# Altium PCB Copy of main - shifted.PcbDoc (part 7 of 15)
Units mil, origin at the board's own origin, x right, y up, seen from the top; angles counter-clockwise.
Board outline 8394.55 x 5164.44 mil, 7 copper layers (Top Layer 1, Layer 2, Layer 3, Unused, Layer 4_pow, Layer 5_gnd, Bottom 6+gnd), stack 46.112 mil thick; 363 components, 409 nets, 1750 pads, 991 vias.
Unrouted connection lines stored in the file: 111.
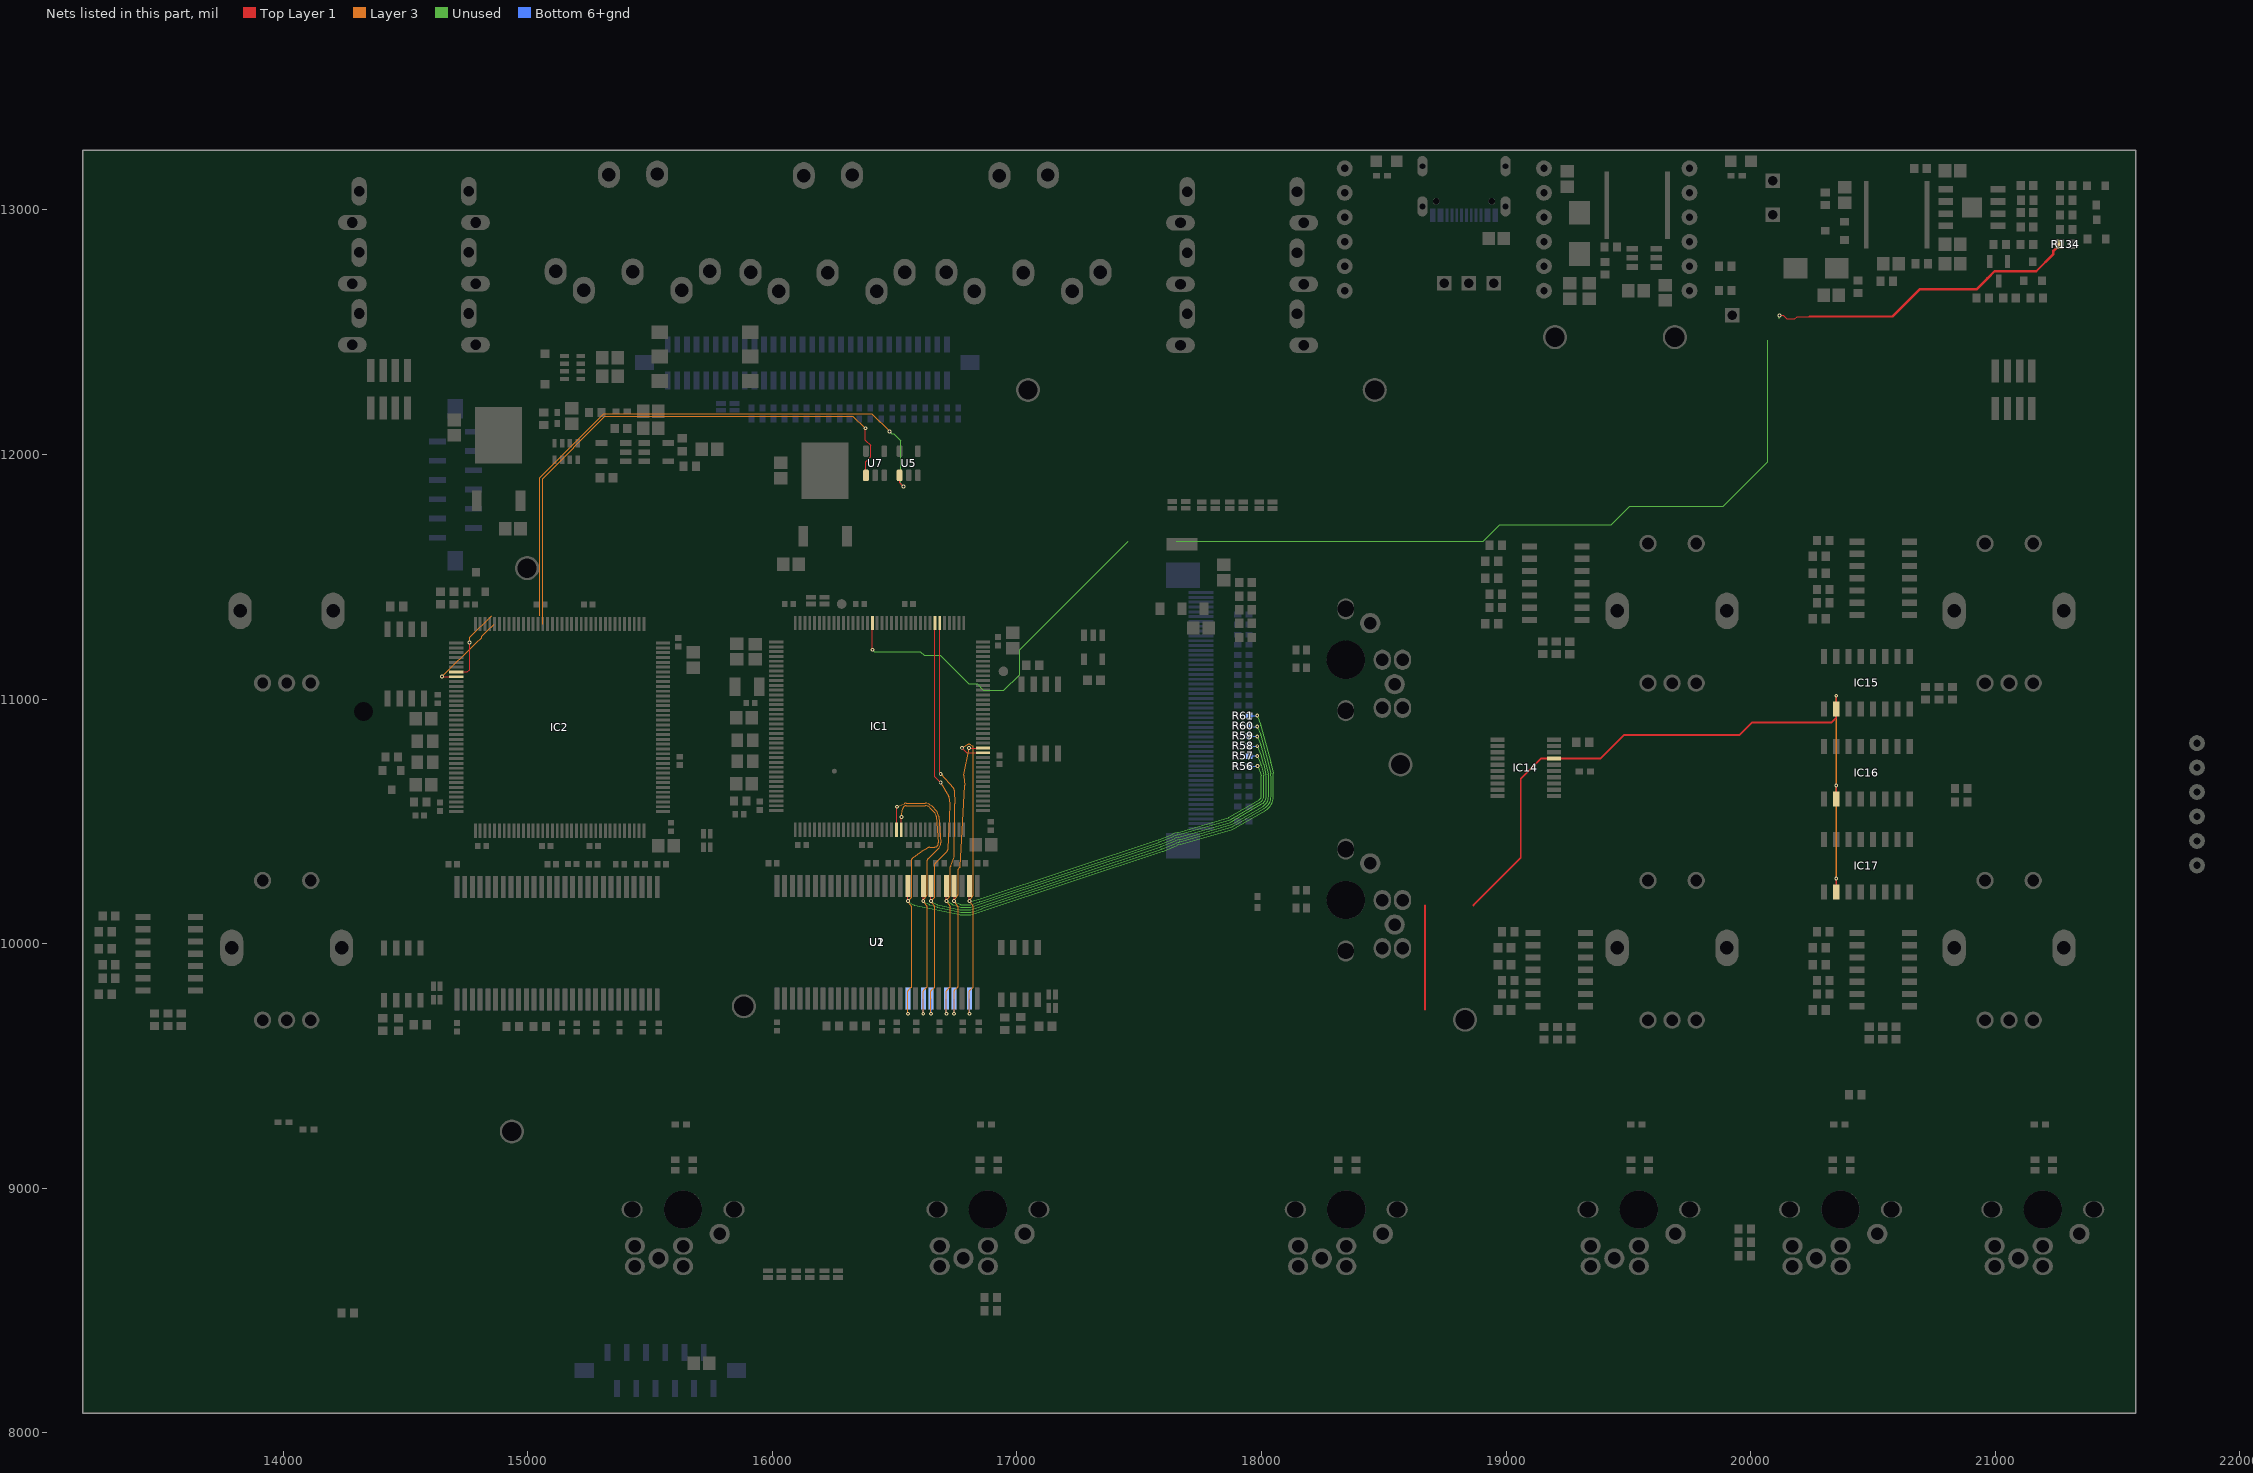
[diagram p10: the nets of this part, all layers, seen from the top]

## Via types
v1: diameter 15.75, hole 7.87, Top Layer 1 to Bottom 6+gnd, tented both sides, 923 vias
v2: diameter 27.56, hole 11.81, Top Layer 1 to Bottom 6+gnd, 45 vias
v3: diameter 23.62/23.62/23.62/23.62/23.62/23.62/23.62 (per signal layer), hole 12, Top Layer 1 to Bottom 6+gnd, tented top, 10 vias
v4: diameter 15.75, hole 7.87, Top Layer 1 to Bottom 6+gnd, 10 vias
v5: diameter 23.62/23.62/23.62/23.62/23.62/23.62/23.62 (per signal layer), hole 12, Top Layer 1 to Bottom 6+gnd, tented bottom, 3 vias

## Nets (pads, with @x,y where several pads share a name; then routed paths per layer and width w, separated by ;. In a path a pad name is that pad's centre, name@x,y a point inside that pad or via, vN(x,y) a via of type N, cw(c..) or ccw(c..) an arc to the next point about the centre after c; other vN are vias at no path point) (continued)
CHR2: IC1.128 R134.1 | length 5889.3
  Top Layer 1 w5: IC1.128@16408.62,11311.57 16408.62,11201.77 v1(16408.67,11201.72) ; v1(20117.63,12569) 20134.22,12569 20148.6,12554.63 20181.14,12554.63 20190.91,12564.4 20242.23,12564.4
  Top Layer 1 w10: 20242.23,12564.3 20580.72,12564.3 20692.99,12676.57 20925.51,12676.57 20968.07,12719.14 20968.07,12720.23 20997.22,12749.37 21033.22,12749.37 21167.91,12749.37 21237.99,12819.45 21237.99,12832.55 21263.46,12858.03 R134.1@21263.46,12860
  Unused w5: v1(16408.67,11201.72) 16409.17,11201.72 16416.62,11194.27 16604.71,11194.27 16620.17,11178.82 16685.32,11178.82 16802.4,11061.74 16836.8,11061.74 16862.71,11035.83 16946.73,11035.83 17011.15,11100.25 17011.15,11201.83 17454.71,11645.39 ; 17651.56,11645.39 18906.57,11645.39 18975,11713.82 19430,11713.82 19504.63,11788.44 19888.44,11788.44 20070,11970 20070,12468.31 ; 20117.63,12555.31 v1(20117.63,12569)
CLK: IC14.17 IC15.2 IC16.2 IC17.2 | length 3363.2
  Top Layer 1 w8: 18669.14,9731.43 18669.14,10156.43 ; 18865.99,10156.43 19060,10350.43 19060,10673.82 19143.39,10757.2 IC14.17@19195.67,10757.2 19386.77,10757.2 19483.38,10853.82 19955,10853.82 20005.91,10904.73 20330.91,10904.73 20350,10923.82 IC15.2@20350,10959.25 v1(20350,11013.82) ; IC17.2@20350,10211.53 v1(20350,10266.1) ; IC16.2@20350,10591.53 v1(20350,10646.1)
  Layer 3 w8: v1(20350,10266.1) v1(20350,10646.1) v1(20350,11013.82)
CODEC_GPIO1: IC2.7 U5.1 | length 2755.6
  Top Layer 1 w5: IC2.7@14707.15,11111.01 14752.23,11111.01 14761.48,11120.26 14761.48,11230.5 v1(14760.86,11231.13) ; U5.1@16520,11915 16520,11885 v1(16535.91,11869.09)
  Unused w5: v1(16479.29,12094.57) 16488.49,12085.37 16495.51,12085.37 16525,12055.88 16525,11880 v1(16535.91,11869.09)
  Layer 3 w5: v1(14760.86,11231.13) 14762.91,11233.19 14762.91,11252.74 14851.57,11341.4 ; 15048.42,11341.4 15048.42,11904.44 15311.34,12167.36 16406.46,12167.36 v1(16479.29,12094.57)
CODEC_GPIO2: IC2.8 U7.1 | length 2615.9
  Top Layer 1 w5: v1(14648.98,11092.54) 14650.2,11091.32 IC2.8@14707.15,11091.32 ; v1(16380.62,12107.57) 16380.62,12058.44 16401.71,12037.34 16401.71,11990.29 16382.6,11971.18 U7.1@16382.6,11915
  Layer 3 w5: v1(14648.98,11092.54) 14650.69,11092.54 14788.15,11230 14789.51,11230 14811.33,11251.82 14811.33,11256.99 14833.15,11278.81 14835.03,11278.81 14863.15,11306.93 ; 15060,11306.93 15060,11901.88 15315.49,12157.36 16329.2,12157.36 16378.99,12107.57 v1(16380.62,12107.57)
D0: IC1.85 R56.2 U1.2 U2.2 | length 2818.1
  Top Layer 1 w5: v1(16775.56,10800.87) 16775.56,10799.7 16794.71,10780.55 IC1.85@16860.91,10780.55 ; v1(16805.86,10174.13) 16805.86,10193.72 U1.2@16806.1,10236.22
  Unused w5: v1(16805.86,10174.13) 16810.86,10174.13 ccw(c16810.86,10179.13) 16812.11,10174.29 16849.48,10183.96 ccw(c16847.6,10191.22) 16849.95,10184.1 17577.92,10424.93 ccw(c17573.21,10439.17) 17578.83,10425.27 17636.68,10448.1 cw(c17710.04,10262.58) 17654.74,10454.26 17863.18,10514.57 cw(c17866.01,10504.98) 17863.37,10514.62 ccw(c17859.4,10529.09) 17866.96,10516.13 17991.32,10588.71 ccw(c17983.57,10601.98) 17998.94,10601.98 17998.94,10681.98 ccw(c17983.57,10681.98) 17998.02,10687.24 v1(17983.57,10726.98)
  Layer 3 w5: v1(16775.56,10800.87) 16775.56,10801.09 16775.29,10801.37 16796.46,10813.13 cw(c16803.93,10799.69) 16811.85,10812.87 16818.82,10808.67 cw(c16816.25,10804.39) 16821.25,10804.48 16821.25,10200.46 cw(c16816.25,10200.55) 16820.43,10197.8 16806.68,10176.88 ccw(c16810.86,10174.13) 16805.86,10174.19 v1(16805.86,10174.13) ccw(c16810.86,10174.13) 16806.91,10171.06 16820.93,10152.99 cw(c16816.98,10149.93) 16821.98,10150.02 16821.98,9825.33 cw(c16816.98,9825.42) 16820.52,9821.89 16807.3,9808.63 ccw(c16810.86,9805.12) 16805.86,9805.12 v1(16805.86,9713.5)
  Bottom 6+gnd w5: v1@16806.1,9713.75 U2.2@16806.1,9775.59 ; R56.2@17948.43,10726.14 17982.72,10726.14 v1(17983.57,10726.98)
D1: IC1.86 R57.2 U1.4 U2.4 | length 3162.8
  Top Layer 1 w5: v1(16742.87,10174.13) U1.4@16742.87,10235.97 ; v1(16803.93,10799.69) 16804.2,10799.96 16860.63,10799.96 IC1.86@16860.75,10800.08
  Unused w5: v1(16742.87,10174.13) 16744.35,10172.65 ccw(c16747.87,10176.21) 16745.56,10171.77 16767.32,10160.47 ccw(c16774.36,10174.13) 16774.36,10158.76 16805.86,10158.76 ccw(c16805.86,10174.13) 16811.06,10159.67 16846.4,10171.96 cw(c16871.26,10100.81) 16847.55,10172.35 17581.09,10415.45 ccw(c17573.21,10439.17) 17582.5,10415.97 17640.38,10438.81 cw(c17710.04,10262.58) 17657.5,10444.65 17866.01,10504.98 cw(c17868.79,10495.37) 17866.07,10504.99 ccw(c17859.4,10529.09) 17872,10507.5 17996.36,10580.07 ccw(c17983.57,10601.98) 18008.94,10601.98 18008.94,10681.98 ccw(c17983.57,10681.98) 18008.31,10687.62 17998.56,10730.4 ccw(c17983.57,10726.98) 17997.62,10733.21 v1(17982.46,10767.45)
  Layer 3 w5: v1(16742.87,9713.5) 16742.87,9805.11 cw(c16747.87,9805.12) 16744.31,9808.63 16757.53,9821.89 ; 16766.69,10312.37 16758.99,10304.67 16758.99,10201.19 ; v1(16803.93,10799.69) 16781.9,10688.37 ; 16757.53,9821.89 ccw(c16753.99,9825.42) 16758.99,9825.33 ; 16757.53,9821.89 ccw(c16753.99,9825.42) 16758.99,9825.33 ; 16757.53,9821.89 ccw(c16753.99,9825.42) 16758.99,9825.33 ; 16757.53,9821.89 ccw(c16753.99,9825.42) 16758.99,9825.33 ; 16757.53,9821.89 ccw(c16753.99,9825.42) 16758.99,9825.33 ; 16757.53,9821.89 ccw(c16753.99,9825.42) 16758.99,9825.33 ; 16757.53,9821.89 ccw(c16753.99,9825.42) 16758.99,9825.33 ; 16757.53,9821.89 ccw(c16753.99,9825.42) 16758.99,9825.33 ; 16757.53,9821.89 ccw(c16753.99,9825.42) 16758.99,9825.33 ; 16757.53,9821.89 ccw(c16753.99,9825.42) 16758.99,9825.33 ; 16757.53,9821.89 ccw(c16753.99,9825.42) 16758.99,9825.33 ; 16757.53,9821.89 ccw(c16753.99,9825.42) 16758.99,9825.33 ; 16757.53,9821.89 ccw(c16753.99,9825.42) 16758.99,9825.33 ; 16757.53,9821.89 ccw(c16753.99,9825.42) 16758.99,9825.33 ; 16757.53,9821.89 ccw(c16753.99,9825.42) 16758.99,9825.33 ; 16757.53,9821.89 ccw(c16753.99,9825.42) 16758.99,9825.33 ; 16757.94,10152.99 cw(c16753.99,10149.93) 16758.99,10150.02 ; 16757.94,10152.99 cw(c16753.99,10149.93) 16758.99,10150.02 ; 16757.94,10152.99 cw(c16753.99,10149.93) 16758.99,10150.02 ; 16757.94,10152.99 cw(c16753.99,10149.93) 16758.99,10150.02 ; 16757.94,10152.99 cw(c16753.99,10149.93) 16758.99,10150.02 ; 16757.94,10152.99 cw(c16753.99,10149.93) 16758.99,10150.02 ; 16757.94,10152.99 cw(c16753.99,10149.93) 16758.99,10150.02 ; 16757.94,10152.99 cw(c16753.99,10149.93) 16758.99,10150.02 ; 16757.94,10152.99 cw(c16753.99,10149.93) 16758.99,10150.02 ; 16757.94,10152.99 cw(c16753.99,10149.93) 16758.99,10150.02 ; 16757.94,10152.99 cw(c16753.99,10149.93) 16758.99,10150.02 ; 16757.94,10152.99 cw(c16753.99,10149.93) 16758.99,10150.02 ; 16757.94,10152.99 cw(c16753.99,10149.93) 16758.99,10150.02 ; 16757.94,10152.99 cw(c16753.99,10149.93) 16758.99,10150.02 ; 16757.94,10152.99 cw(c16753.99,10149.93) 16758.99,10150.02 ; 16757.94,10152.99 cw(c16753.99,10149.93) 16758.99,10150.02 ; 16757.94,10152.99 16743.92,10171.06 cw(c16747.87,10174.13) v1(16742.87,10174.13) 16742.87,10174.19 cw(c16747.87,10174.13) 16743.7,10176.9 16758.15,10198.5 ; 16758.15,10198.5 ccw(c16753.99,10201.28) 16758.99,10201.19 ; 16758.15,10198.5 ccw(c16753.99,10201.28) 16758.99,10201.19 ; 16758.15,10198.5 ccw(c16753.99,10201.28) 16758.99,10201.19 ; 16758.15,10198.5 ccw(c16753.99,10201.28) 16758.99,10201.19 ; 16758.15,10198.5 ccw(c16753.99,10201.28) 16758.99,10201.19 ; 16758.15,10198.5 ccw(c16753.99,10201.28) 16758.99,10201.19 ; 16758.15,10198.5 ccw(c16753.99,10201.28) 16758.99,10201.19 ; 16758.15,10198.5 ccw(c16753.99,10201.28) 16758.99,10201.19 ; 16758.15,10198.5 ccw(c16753.99,10201.28) 16758.99,10201.19 ; 16758.15,10198.5 ccw(c16753.99,10201.28) 16758.99,10201.19 ; 16758.15,10198.5 ccw(c16753.99,10201.28) 16758.99,10201.19 ; 16758.15,10198.5 ccw(c16753.99,10201.28) 16758.99,10201.19 ; 16758.15,10198.5 ccw(c16753.99,10201.28) 16758.99,10201.19 ; 16758.15,10198.5 ccw(c16753.99,10201.28) 16758.99,10201.19 ; 16758.15,10198.5 ccw(c16753.99,10201.28) 16758.99,10201.19 ; 16758.15,10198.5 ccw(c16753.99,10201.28) 16758.99,10201.19 ; 16758.99,9825.33 16758.99,10150.02 ; 16766.7,10312.39 ccw(c16763.12,10315.88) 16768.11,10315.61 ; 16766.7,10312.39 ccw(c16763.12,10315.88) 16768.11,10315.61 ; 16766.7,10312.39 ccw(c16763.12,10315.88) 16768.11,10315.61 ; 16766.7,10312.39 ccw(c16763.12,10315.88) 16768.11,10315.61 ; 16766.7,10312.39 ccw(c16763.12,10315.88) 16768.11,10315.61 ; 16766.7,10312.39 ccw(c16763.12,10315.88) 16768.11,10315.61 ; 16766.7,10312.39 ccw(c16763.12,10315.88) 16768.11,10315.61 ; 16766.7,10312.39 ccw(c16763.12,10315.88) 16768.11,10315.61 ; 16766.7,10312.39 ccw(c16763.12,10315.88) 16768.11,10315.61 ; 16766.7,10312.39 ccw(c16763.12,10315.88) 16768.11,10315.61 ; 16766.7,10312.39 ccw(c16763.12,10315.88) 16768.11,10315.61 ; 16766.7,10312.39 ccw(c16763.12,10315.88) 16768.11,10315.61 ; 16766.7,10312.39 ccw(c16763.12,10315.88) 16768.11,10315.61 ; 16766.7,10312.39 ccw(c16763.12,10315.88) 16768.11,10315.61 ; 16766.7,10312.39 ccw(c16763.12,10315.88) 16768.11,10315.61 ; 16766.7,10312.39 ccw(c16763.12,10315.88) 16768.11,10315.61 ; 16768.11,10315.61 16785.59,10645.65 ; 16781.71,10683.74 cw(c16796.99,10685.43) 16781.9,10688.37 ; 16781.71,10683.74 cw(c16796.99,10685.43) 16781.9,10688.37 ; 16781.71,10683.74 cw(c16796.99,10685.43) 16781.9,10688.37 ; 16781.71,10683.74 cw(c16796.99,10685.43) 16781.9,10688.37 ; 16781.71,10683.74 cw(c16796.99,10685.43) 16781.9,10688.37 ; 16781.71,10683.74 cw(c16796.99,10685.43) 16781.9,10688.37 ; 16781.71,10683.74 cw(c16796.99,10685.43) 16781.9,10688.37 ; 16781.71,10683.74 cw(c16796.99,10685.43) 16781.9,10688.37 ; 16781.71,10683.74 cw(c16796.99,10685.43) 16781.9,10688.37 ; 16781.71,10683.74 cw(c16796.99,10685.43) 16781.9,10688.37 ; 16781.71,10683.74 cw(c16796.99,10685.43) 16781.9,10688.37 ; 16781.71,10683.74 cw(c16796.99,10685.43) 16781.9,10688.37 ; 16781.71,10683.74 cw(c16796.99,10685.43) 16781.9,10688.37 ; 16781.71,10683.74 cw(c16796.99,10685.43) 16781.9,10688.37 ; 16781.71,10683.74 cw(c16796.99,10685.43) 16781.9,10688.37 ; 16781.71,10683.74 cw(c16796.99,10685.43) 16781.9,10688.37 ; 16781.71,10683.74 16785.53,10648.16 ; 16785.53,10648.16 cw(c16770.24,10646.51) 16785.59,10645.65 ; 16785.53,10648.16 cw(c16770.24,10646.51) 16785.59,10645.65 ; 16785.53,10648.16 cw(c16770.24,10646.51) 16785.59,10645.65 ; 16785.53,10648.16 cw(c16770.24,10646.51) 16785.59,10645.65 ; 16785.53,10648.16 cw(c16770.24,10646.51) 16785.59,10645.65 ; 16785.53,10648.16 cw(c16770.24,10646.51) 16785.59,10645.65 ; 16785.53,10648.16 cw(c16770.24,10646.51) 16785.59,10645.65 ; 16785.53,10648.16 cw(c16770.24,10646.51) 16785.59,10645.65 ; 16785.53,10648.16 cw(c16770.24,10646.51) 16785.59,10645.65 ; 16785.53,10648.16 cw(c16770.24,10646.51) 16785.59,10645.65 ; 16785.53,10648.16 cw(c16770.24,10646.51) 16785.59,10645.65 ; 16785.53,10648.16 cw(c16770.24,10646.51) 16785.59,10645.65 ; 16785.53,10648.16 cw(c16770.24,10646.51) 16785.59,10645.65 ; 16785.53,10648.16 cw(c16770.24,10646.51) 16785.59,10645.65 ; 16785.53,10648.16 cw(c16770.24,10646.51) 16785.59,10645.65 ; 16785.53,10648.16 cw(c16770.24,10646.51) 16785.59,10645.65
  Bottom 6+gnd w5: v1@16743.11,9713.75 U2.4@16743.11,9775.59 ; R57.2@17948.43,10767.45 v1(17982.46,10767.45)
D2: IC1.114 R58.2 U1.5 U2.5 | length 3747.1
  Top Layer 1 w5: IC1.114@16684.21,11311.57 16684.21,10700.66 16688.15,10696.73 v1(16688.15,10693.82) ; v1(16711.37,10174.13) 16711.37,10193.72 U1.5@16711.61,10236.22
  Unused w5: v1@16713.85,10172.67 ccw(c16716.37,10176.99) 16713.94,10172.62 16735.47,10160.65 ccw(c16742.87,10174.13) 16737.92,10159.58 16766.34,10150.06 ccw(c16774.36,10174.13) 16774.36,10148.76 16805.86,10148.76 ccw(c16805.86,10174.13) 16814.32,10150.21 16849.68,10162.52 cw(c16871.26,10100.81) 16850.7,10162.86 17584.2,10405.95 ccw(c17573.21,10439.17) 17586.17,10406.66 17644.1,10429.53 cw(c17710.04,10262.58) 17660.24,10435.03 17868.79,10495.37 ccw(c17859.4,10529.09) 17877.04,10498.86 18001.4,10571.43 ccw(c17983.57,10601.98) 18018.94,10601.98 18018.94,10681.98 ccw(c17983.57,10681.98) 18018.06,10689.85 18008.31,10732.62 ccw(c17983.57,10726.98) 18007.97,10733.92 17997.25,10771.66 ccw(c17982.46,10767.45) 17996.65,10773.36 v1(17982.46,10807.45)
  Layer 3 w5: v1(16688.15,10693.82) 16739.14,10637.17 cw(c16727.71,10626.89) 16743.05,10627.9 16743.06,10627.74 16746.21,10572.32 ; v1(16711.37,9713.5) 16711.37,9805.11 cw(c16716.37,9805.12) 16712.82,9808.63 16726.03,9821.89 ; 16726.03,9821.89 ccw(c16722.49,9825.42) 16727.49,9825.33 ; 16726.03,9821.89 ccw(c16722.49,9825.42) 16727.49,9825.33 ; 16726.03,9821.89 ccw(c16722.49,9825.42) 16727.49,9825.33 ; 16726.03,9821.89 ccw(c16722.49,9825.42) 16727.49,9825.33 ; 16726.03,9821.89 ccw(c16722.49,9825.42) 16727.49,9825.33 ; 16726.03,9821.89 ccw(c16722.49,9825.42) 16727.49,9825.33 ; 16726.03,9821.89 ccw(c16722.49,9825.42) 16727.49,9825.33 ; 16726.03,9821.89 ccw(c16722.49,9825.42) 16727.49,9825.33 ; 16726.03,9821.89 ccw(c16722.49,9825.42) 16727.49,9825.33 ; 16726.03,9821.89 ccw(c16722.49,9825.42) 16727.49,9825.33 ; 16726.03,9821.89 ccw(c16722.49,9825.42) 16727.49,9825.33 ; 16726.03,9821.89 ccw(c16722.49,9825.42) 16727.49,9825.33 ; 16726.03,9821.89 ccw(c16722.49,9825.42) 16727.49,9825.33 ; 16726.03,9821.89 ccw(c16722.49,9825.42) 16727.49,9825.33 ; 16726.03,9821.89 ccw(c16722.49,9825.42) 16727.49,9825.33 ; 16726.03,9821.89 ccw(c16722.49,9825.42) 16727.49,9825.33 ; 16726.44,10152.99 cw(c16722.49,10149.93) 16727.49,10150.02 ; 16726.44,10152.99 cw(c16722.49,10149.93) 16727.49,10150.02 ; 16726.44,10152.99 cw(c16722.49,10149.93) 16727.49,10150.02 ; 16726.44,10152.99 cw(c16722.49,10149.93) 16727.49,10150.02 ; 16726.44,10152.99 cw(c16722.49,10149.93) 16727.49,10150.02 ; 16726.44,10152.99 cw(c16722.49,10149.93) 16727.49,10150.02 ; 16726.44,10152.99 cw(c16722.49,10149.93) 16727.49,10150.02 ; 16726.44,10152.99 cw(c16722.49,10149.93) 16727.49,10150.02 ; 16726.44,10152.99 cw(c16722.49,10149.93) 16727.49,10150.02 ; 16726.44,10152.99 cw(c16722.49,10149.93) 16727.49,10150.02 ; 16726.44,10152.99 cw(c16722.49,10149.93) 16727.49,10150.02 ; 16726.44,10152.99 cw(c16722.49,10149.93) 16727.49,10150.02 ; 16726.44,10152.99 cw(c16722.49,10149.93) 16727.49,10150.02 ; 16726.44,10152.99 cw(c16722.49,10149.93) 16727.49,10150.02 ; 16726.44,10152.99 cw(c16722.49,10149.93) 16727.49,10150.02 ; 16726.44,10152.99 cw(c16722.49,10149.93) 16727.49,10150.02 ; 16726.44,10152.99 16712.45,10171.03 cw(c16716.37,10174.13) v1(16711.37,10174.13) 16711.37,10174.19 cw(c16716.37,10174.13) 16712.45,10177.24 16726.9,10195.45 ; 16726.9,10195.45 ccw(c16722.98,10198.56) 16727.98,10198.47 ; 16726.9,10195.45 ccw(c16722.98,10198.56) 16727.98,10198.47 ; 16726.9,10195.45 ccw(c16722.98,10198.56) 16727.98,10198.47 ; 16726.9,10195.45 ccw(c16722.98,10198.56) 16727.98,10198.47 ; 16726.9,10195.45 ccw(c16722.98,10198.56) 16727.98,10198.47 ; 16726.9,10195.45 ccw(c16722.98,10198.56) 16727.98,10198.47 ; 16726.9,10195.45 ccw(c16722.98,10198.56) 16727.98,10198.47 ; 16726.9,10195.45 ccw(c16722.98,10198.56) 16727.98,10198.47 ; 16726.9,10195.45 ccw(c16722.98,10198.56) 16727.98,10198.47 ; 16726.9,10195.45 ccw(c16722.98,10198.56) 16727.98,10198.47 ; 16726.9,10195.45 ccw(c16722.98,10198.56) 16727.98,10198.47 ; 16726.9,10195.45 ccw(c16722.98,10198.56) 16727.98,10198.47 ; 16726.9,10195.45 ccw(c16722.98,10198.56) 16727.98,10198.47 ; 16726.9,10195.45 ccw(c16722.98,10198.56) 16727.98,10198.47 ; 16726.9,10195.45 ccw(c16722.98,10198.56) 16727.98,10198.47 ; 16726.9,10195.45 ccw(c16722.98,10198.56) 16727.98,10198.47 ; 16727.49,9825.33 16727.49,10150.02 ; 16727.98,10198.47 16727.98,10314.09 cw(c16732.98,10314.1) 16728.34,10315.95 16741.71,10349.4 ; 16741.71,10349.4 ccw(c16718.15,10358.82) 16743.52,10358.48 ; 16741.71,10349.4 ccw(c16718.15,10358.82) 16743.52,10358.48 ; 16741.71,10349.4 ccw(c16718.15,10358.82) 16743.52,10358.48 ; 16741.71,10349.4 ccw(c16718.15,10358.82) 16743.52,10358.48 ; 16741.71,10349.4 ccw(c16718.15,10358.82) 16743.52,10358.48 ; 16741.71,10349.4 ccw(c16718.15,10358.82) 16743.52,10358.48 ; 16741.71,10349.4 ccw(c16718.15,10358.82) 16743.52,10358.48 ; 16741.71,10349.4 ccw(c16718.15,10358.82) 16743.52,10358.48 ; 16741.71,10349.4 ccw(c16718.15,10358.82) 16743.52,10358.48 ; 16741.71,10349.4 ccw(c16718.15,10358.82) 16743.52,10358.48 ; 16741.71,10349.4 ccw(c16718.15,10358.82) 16743.52,10358.48 ; 16741.71,10349.4 ccw(c16718.15,10358.82) 16743.52,10358.48 ; 16741.71,10349.4 ccw(c16718.15,10358.82) 16743.52,10358.48 ; 16741.71,10349.4 ccw(c16718.15,10358.82) 16743.52,10358.48 ; 16741.71,10349.4 ccw(c16718.15,10358.82) 16743.52,10358.48 ; 16741.71,10349.4 ccw(c16718.15,10358.82) 16743.52,10358.48 ; 16743.52,10358.48 16745.61,10516.74 16746.26,10569.88 ; 16746.21,10572.32 cw(c16710.89,10570.31) 16746.26,10569.88 ; 16746.21,10572.32 cw(c16710.89,10570.31) 16746.26,10569.88 ; 16746.21,10572.32 cw(c16710.89,10570.31) 16746.26,10569.88 ; 16746.21,10572.32 cw(c16710.89,10570.31) 16746.26,10569.88 ; 16746.21,10572.32 cw(c16710.89,10570.31) 16746.26,10569.88 ; 16746.21,10572.32 cw(c16710.89,10570.31) 16746.26,10569.88 ; 16746.21,10572.32 cw(c16710.89,10570.31) 16746.26,10569.88 ; 16746.21,10572.32 cw(c16710.89,10570.31) 16746.26,10569.88 ; 16746.21,10572.32 cw(c16710.89,10570.31) 16746.26,10569.88 ; 16746.21,10572.32 cw(c16710.89,10570.31) 16746.26,10569.88 ; 16746.21,10572.32 cw(c16710.89,10570.31) 16746.26,10569.88 ; 16746.21,10572.32 cw(c16710.89,10570.31) 16746.26,10569.88 ; 16746.21,10572.32 cw(c16710.89,10570.31) 16746.26,10569.88 ; 16746.21,10572.32 cw(c16710.89,10570.31) 16746.26,10569.88 ; 16746.21,10572.32 cw(c16710.89,10570.31) 16746.26,10569.88 ; 16746.21,10572.32 cw(c16710.89,10570.31) 16746.26,10569.88
  Bottom 6+gnd w5: v1@16711.61,9713.75 U2.5@16711.61,9775.59 ; R58.2@17947.32,10807.66 17982.25,10807.66 v1(17982.46,10807.45)
D3: IC1.115 R59.2 U1.7 U2.7 | length 3756.2
  Top Layer 1 w5: v1@16648.03,10176.1 16648.03,10193.72 U1.7@16648.38,10235.48 ; IC1.115@16664.69,11311.42 16664.69,10682.28 v1(16688.15,10658.82)
  Unused w5: v1@16649.11,10174.38 v1(16648.38,10174.13) ; v1(17982.46,10847.45) 17996.65,10813.36 cw(c17982.46,10807.45) 17997.3,10811.48 18017.71,10736.25 cw(c17983.57,10726.98) 18018.07,10734.8 18027.81,10692.07 cw(c17983.57,10681.98) 18028.94,10681.98 18028.94,10601.98 cw(c17983.57,10601.98) 18006.44,10562.8 17882.08,10490.22 cw(c17859.4,10529.09) 17871.57,10485.76 17663.01,10425.42 ccw(c17710.04,10262.58) 17647.76,10420.22 17589.84,10397.36 cw(c17573.21,10439.17) 17587.34,10396.45 16853.84,10153.37 ccw(c16871.26,10100.81) 16853.01,10153.09 16817.6,10140.76 cw(c16805.86,10174.13) 16805.86,10138.76 16774.36,10138.76 cw(c16774.36,10174.13) 16766.88,10139.56 16676.53,10159.13 cw(c16679.87,10174.13) 16672.93,10160.42 16651.7,10171.16 cw(c16653.95,10175.63) 16650.45,10172.06 v1(16648.38,10174.13) ; v1@16648.03,10176.1 cw(c16643.38,10174.28) v1@16648.38,10174.16 ; v1@16648.03,10176.1 cw(c16643.38,10174.28) v1@16648.38,10174.16 ; v1@16648.03,10176.1 cw(c16643.38,10174.28) v1@16648.38,10174.16 ; v1@16648.03,10176.1 cw(c16643.38,10174.28) v1@16648.38,10174.16 ; v1@16648.03,10176.1 cw(c16643.38,10174.28) v1@16648.38,10174.16 ; v1@16648.03,10176.1 cw(c16643.38,10174.28) v1@16648.38,10174.16 ; v1@16648.03,10176.1 cw(c16643.38,10174.28) v1@16648.38,10174.16 ; v1@16648.03,10176.1 cw(c16643.38,10174.28) v1@16648.38,10174.16 ; v1@16648.03,10176.1 cw(c16643.38,10174.28) v1@16648.38,10174.16 ; v1@16648.03,10176.1 cw(c16643.38,10174.28) v1@16648.38,10174.16 ; v1@16648.03,10176.1 cw(c16643.38,10174.28) v1@16648.38,10174.16 ; v1@16648.03,10176.1 cw(c16643.38,10174.28) v1@16648.38,10174.16 ; v1@16648.03,10176.1 cw(c16643.38,10174.28) v1@16648.38,10174.16 ; v1@16648.03,10176.1 cw(c16643.38,10174.28) v1@16648.38,10174.16
  Layer 3 w5: v1(16648.38,9713.5) 16648.38,9805.11 cw(c16653.38,9805.11) 16649.83,9808.64 16663.04,9821.89 ; 16664,10324.67 16664,10191.78 cw(c16659,10191.87) 16662.54,10188.34 v1(16648.38,10174.13) v1@16648.38,10172.06 ; 16664,10324.68 cw(c16669,10324.68) 16665.42,10328.16 16714.15,10378.08 ccw(c16703.15,10388.82) 16718.5,10387.97 16725.59,10516.36 ; v1(16688.15,10658.82) 16721.2,10602.23 cw(c16716.88,10599.71) 16721.82,10600.5 ; 16721.82,10600.47 16726.09,10572.64 cw(c16710.89,10570.31) 16726.26,10570.13 ; 16726.26,10570.12 16725.61,10517.01 ; v1@16648.38,10172.06 ccw(c16653.38,10172.07) v1@16649.62,10168.77 ; v1@16648.38,10172.06 ccw(c16653.38,10172.07) v1@16649.62,10168.77 ; v1@16648.38,10172.06 ccw(c16653.38,10172.07) v1@16649.62,10168.77 ; v1@16648.38,10172.06 ccw(c16653.38,10172.07) v1@16649.62,10168.77 ; v1@16648.38,10172.06 ccw(c16653.38,10172.07) v1@16649.62,10168.77 ; v1@16648.38,10172.06 ccw(c16653.38,10172.07) v1@16649.62,10168.77 ; v1@16648.38,10172.06 ccw(c16653.38,10172.07) v1@16649.62,10168.77 ; v1@16648.38,10172.06 ccw(c16653.38,10172.07) v1@16649.62,10168.77 ; v1@16648.38,10172.06 ccw(c16653.38,10172.07) v1@16649.62,10168.77 ; v1@16648.38,10172.06 ccw(c16653.38,10172.07) v1@16649.62,10168.77 ; v1@16648.38,10172.06 ccw(c16653.38,10172.07) v1@16649.62,10168.77 ; v1@16648.38,10172.06 ccw(c16653.38,10172.07) v1@16649.62,10168.77 ; v1@16648.38,10172.06 ccw(c16653.38,10172.07) v1@16649.62,10168.77 ; v1@16648.38,10172.06 ccw(c16653.38,10172.07) v1@16649.62,10168.77 ; v1@16648.38,10172.06 ccw(c16653.38,10172.07) v1@16649.62,10168.77 ; v1@16648.38,10172.06 ccw(c16653.38,10172.07) v1@16649.62,10168.77 ; v1@16649.62,10168.77 16663.26,10153.23 ; 16663.04,9821.89 ccw(c16659.5,9825.42) 16664.5,9825.33 ; 16663.04,9821.89 ccw(c16659.5,9825.42) 16664.5,9825.33 ; 16663.04,9821.89 ccw(c16659.5,9825.42) 16664.5,9825.33 ; 16663.04,9821.89 ccw(c16659.5,9825.42) 16664.5,9825.33 ; 16663.04,9821.89 ccw(c16659.5,9825.42) 16664.5,9825.33 ; 16663.04,9821.89 ccw(c16659.5,9825.42) 16664.5,9825.33 ; 16663.04,9821.89 ccw(c16659.5,9825.42) 16664.5,9825.33 ; 16663.04,9821.89 ccw(c16659.5,9825.42) 16664.5,9825.33 ; 16663.04,9821.89 ccw(c16659.5,9825.42) 16664.5,9825.33 ; 16663.04,9821.89 ccw(c16659.5,9825.42) 16664.5,9825.33 ; 16663.04,9821.89 ccw(c16659.5,9825.42) 16664.5,9825.33 ; 16663.04,9821.89 ccw(c16659.5,9825.42) 16664.5,9825.33 ; 16663.04,9821.89 ccw(c16659.5,9825.42) 16664.5,9825.33 ; 16663.04,9821.89 ccw(c16659.5,9825.42) 16664.5,9825.33 ; 16663.04,9821.89 ccw(c16659.5,9825.42) 16664.5,9825.33 ; 16663.04,9821.89 ccw(c16659.5,9825.42) 16664.5,9825.33 ; 16663.26,10153.23 cw(c16659.5,10149.93) 16664.5,10150.02 ; 16663.26,10153.23 cw(c16659.5,10149.93) 16664.5,10150.02 ; 16663.26,10153.23 cw(c16659.5,10149.93) 16664.5,10150.02 ; 16663.26,10153.23 cw(c16659.5,10149.93) 16664.5,10150.02 ; 16663.26,10153.23 cw(c16659.5,10149.93) 16664.5,10150.02 ; 16663.26,10153.23 cw(c16659.5,10149.93) 16664.5,10150.02 ; 16663.26,10153.23 cw(c16659.5,10149.93) 16664.5,10150.02 ; 16663.26,10153.23 cw(c16659.5,10149.93) 16664.5,10150.02 ; 16663.26,10153.23 cw(c16659.5,10149.93) 16664.5,10150.02 ; 16663.26,10153.23 cw(c16659.5,10149.93) 16664.5,10150.02 ; 16663.26,10153.23 cw(c16659.5,10149.93) 16664.5,10150.02 ; 16663.26,10153.23 cw(c16659.5,10149.93) 16664.5,10150.02 ; 16663.26,10153.23 cw(c16659.5,10149.93) 16664.5,10150.02 ; 16663.26,10153.23 cw(c16659.5,10149.93) 16664.5,10150.02 ; 16663.26,10153.23 cw(c16659.5,10149.93) 16664.5,10150.02 ; 16663.26,10153.23 cw(c16659.5,10149.93) 16664.5,10150.02 ; 16664.5,9825.33 16664.5,10150.02 ; 16725.59,10516.36 ccw(c16710.24,10517.2) 16725.61,10517.01 ; 16725.59,10516.36 ccw(c16710.24,10517.2) 16725.61,10517.01 ; 16725.59,10516.36 ccw(c16710.24,10517.2) 16725.61,10517.01 ; 16725.59,10516.36 ccw(c16710.24,10517.2) 16725.61,10517.01 ; 16725.59,10516.36 ccw(c16710.24,10517.2) 16725.61,10517.01 ; 16725.59,10516.36 ccw(c16710.24,10517.2) 16725.61,10517.01 ; 16725.59,10516.36 ccw(c16710.24,10517.2) 16725.61,10517.01 ; 16725.59,10516.36 ccw(c16710.24,10517.2) 16725.61,10517.01 ; 16725.59,10516.36 ccw(c16710.24,10517.2) 16725.61,10517.01 ; 16725.59,10516.36 ccw(c16710.24,10517.2) 16725.61,10517.01 ; 16725.59,10516.36 ccw(c16710.24,10517.2) 16725.61,10517.01 ; 16725.59,10516.36 ccw(c16710.24,10517.2) 16725.61,10517.01 ; 16725.59,10516.36 ccw(c16710.24,10517.2) 16725.61,10517.01 ; 16725.59,10516.36 ccw(c16710.24,10517.2) 16725.61,10517.01 ; 16725.59,10516.36 ccw(c16710.24,10517.2) 16725.61,10517.01 ; 16725.59,10516.36 ccw(c16710.24,10517.2) 16725.61,10517.01
  Bottom 6+gnd w5: v1@16648.62,9713.75 U2.7@16648.62,9775.59 ; R59.2@17947.32,10848.97 17948.43,10848.97 17980.94,10848.97 v1(17982.46,10847.45)
D4: IC1.58 R60.2 U1.8 U2.8 | length 4530.7
  Top Layer 1 w5: IC1.58@16507.21,10465.91 16507.6,10466.3 16507.6,10558.27 v1(16509.02,10559.69) ; v1@16616.54,10177.2 16616.54,10193.72 U1.8@16616.88,10235.48
  Unused w5: v1@16616.54,10177.2 ccw(c16621.54,10177.23) 16616.71,10175.96 16616.74,10175.85 cw(c16611.9,10174.58) 16616.89,10174.28 v1(16616.88,10174.13) ; v1(17982.46,10887.45) 17996.65,10853.36 cw(c17982.46,10847.45) 17997.31,10851.42 18027.41,10738.69 cw(c17983.57,10726.98) 18027.82,10737 18037.56,10694.29 cw(c17983.57,10681.98) 18038.94,10681.98 18038.94,10601.98 cw(c17983.57,10601.98) 18011.48,10554.16 17887.12,10481.59 cw(c17859.4,10529.09) 17874.35,10476.16 17665.74,10415.8 ccw(c17710.04,10262.58) 17651.45,10410.93 17593.5,10388.05 cw(c17573.21,10439.17) 17590.48,10386.96 16857.02,10143.89 ccw(c16871.26,10100.81) 16856.28,10143.64 16820.87,10131.31 cw(c16805.86,10174.13) 16805.86,10128.76 16774.36,10128.76 cw(c16774.36,10174.13) 16764.76,10129.79 16674.41,10149.35 cw(c16679.87,10174.13) 16671.89,10150.05 16643.49,10159.55 cw(c16648.38,10174.13) 16641.26,10160.51 16619.43,10171.91 cw(c16621.74,10176.34) 16618.25,10172.76 v1(16616.88,10174.13) ; v1(16616.88,10174.13) ccw(c16611.9,10174.58) 16616.55,10176.43 cw(c16611.9,10174.58) v1(16616.88,10174.13)
  Layer 3 w5: v1(16509.02,10559.69) 16538.18,10572.15 ; v1(16616.88,9713.5) 16616.88,9805.11 cw(c16621.88,9805.12) 16618.33,9808.63 16631.54,9821.89 ; 16679.86,10521.47 16688.8,10412.59 ; 16538.18,10572.15 cw(c16548.15,10548.82) 16548.23,10574.19 ; 16538.18,10572.15 cw(c16548.15,10548.82) 16548.23,10574.19 ; 16538.18,10572.15 cw(c16548.15,10548.82) 16548.23,10574.19 ; 16538.18,10572.15 cw(c16548.15,10548.82) 16548.23,10574.19 ; 16538.18,10572.15 cw(c16548.15,10548.82) 16548.23,10574.19 ; 16538.18,10572.15 cw(c16548.15,10548.82) 16548.23,10574.19 ; 16538.18,10572.15 cw(c16548.15,10548.82) 16548.23,10574.19 ; 16538.18,10572.15 cw(c16548.15,10548.82) 16548.23,10574.19 ; 16548.23,10574.19 16625.32,10573.96 ; 16625.32,10573.96 cw(c16625.24,10538.58) 16650.66,10563.18 ; 16625.32,10573.96 cw(c16625.24,10538.58) 16650.66,10563.18 ; 16625.32,10573.96 cw(c16625.24,10538.58) 16650.66,10563.18 ; 16625.32,10573.96 cw(c16625.24,10538.58) 16650.66,10563.18 ; 16625.32,10573.96 cw(c16625.24,10538.58) 16650.66,10563.18 ; 16625.32,10573.96 cw(c16625.24,10538.58) 16650.66,10563.18 ; 16625.32,10573.96 cw(c16625.24,10538.58) 16650.66,10563.18 ; 16625.32,10573.96 cw(c16625.24,10538.58) 16650.66,10563.18 ; 16625.32,10573.96 cw(c16625.24,10538.58) 16650.66,10563.18 ; 16625.32,10573.96 cw(c16625.24,10538.58) 16650.66,10563.18 ; 16625.32,10573.96 cw(c16625.24,10538.58) 16650.66,10563.18 ; 16625.32,10573.96 cw(c16625.24,10538.58) 16650.66,10563.18 ; 16625.32,10573.96 cw(c16625.24,10538.58) 16650.66,10563.18 ; 16625.32,10573.96 cw(c16625.24,10538.58) 16650.66,10563.18 ; 16625.32,10573.96 cw(c16625.24,10538.58) 16650.66,10563.18 ; 16625.32,10573.96 cw(c16625.24,10538.58) 16650.66,10563.18 ; 16631.54,9821.89 ccw(c16628,9825.42) 16633,9825.33 ; 16631.54,9821.89 ccw(c16628,9825.42) 16633,9825.33 ; 16631.54,9821.89 ccw(c16628,9825.42) 16633,9825.33 ; 16631.54,9821.89 ccw(c16628,9825.42) 16633,9825.33 ; 16631.54,9821.89 ccw(c16628,9825.42) 16633,9825.33 ; 16631.54,9821.89 ccw(c16628,9825.42) 16633,9825.33 ; 16631.54,9821.89 ccw(c16628,9825.42) 16633,9825.33 ; 16631.54,9821.89 ccw(c16628,9825.42) 16633,9825.33 ; 16631.54,9821.89 ccw(c16628,9825.42) 16633,9825.33 ; 16631.54,9821.89 ccw(c16628,9825.42) 16633,9825.33 ; 16631.54,9821.89 ccw(c16628,9825.42) 16633,9825.33 ; 16631.54,9821.89 ccw(c16628,9825.42) 16633,9825.33 ; 16631.54,9821.89 ccw(c16628,9825.42) 16633,9825.33 ; 16631.54,9821.89 ccw(c16628,9825.42) 16633,9825.33 ; 16631.54,9821.89 ccw(c16628,9825.42) 16633,9825.33 ; 16631.54,9821.89 ccw(c16628,9825.42) 16633,9825.33 ; 16631.95,10152.99 cw(c16628,10149.93) 16633,10150.02 ; 16631.95,10152.99 cw(c16628,10149.93) 16633,10150.02 ; 16631.95,10152.99 cw(c16628,10149.93) 16633,10150.02 ; 16631.95,10152.99 cw(c16628,10149.93) 16633,10150.02 ; 16631.95,10152.99 cw(c16628,10149.93) 16633,10150.02 ; 16631.95,10152.99 cw(c16628,10149.93) 16633,10150.02 ; 16631.95,10152.99 cw(c16628,10149.93) 16633,10150.02 ; 16631.95,10152.99 cw(c16628,10149.93) 16633,10150.02 ; 16631.95,10152.99 cw(c16628,10149.93) 16633,10150.02 ; 16631.95,10152.99 cw(c16628,10149.93) 16633,10150.02 ; 16631.95,10152.99 cw(c16628,10149.93) 16633,10150.02 ; 16631.95,10152.99 cw(c16628,10149.93) 16633,10150.02 ; 16631.95,10152.99 cw(c16628,10149.93) 16633,10150.02 ; 16631.95,10152.99 cw(c16628,10149.93) 16633,10150.02 ; 16631.95,10152.99 cw(c16628,10149.93) 16633,10150.02 ; 16631.95,10152.99 cw(c16628,10149.93) 16633,10150.02 ; 16631.95,10152.99 16617.94,10171.06 cw(c16621.88,10174.13) v1(16616.88,10174.13) 16616.88,10174.19 cw(c16621.88,10174.13) 16617.68,10176.85 16632.45,10199.68 ; 16632.45,10199.68 ccw(c16628.25,10202.4) 16633.25,10202.31 ; 16632.45,10199.68 ccw(c16628.25,10202.4) 16633.25,10202.31 ; 16632.45,10199.68 ccw(c16628.25,10202.4) 16633.25,10202.31 ; 16632.45,10199.68 ccw(c16628.25,10202.4) 16633.25,10202.31 ; 16632.45,10199.68 ccw(c16628.25,10202.4) 16633.25,10202.31 ; 16632.45,10199.68 ccw(c16628.25,10202.4) 16633.25,10202.31 ; 16632.45,10199.68 ccw(c16628.25,10202.4) 16633.25,10202.31 ; 16632.45,10199.68 ccw(c16628.25,10202.4) 16633.25,10202.31 ; 16632.45,10199.68 ccw(c16628.25,10202.4) 16633.25,10202.31 ; 16632.45,10199.68 ccw(c16628.25,10202.4) 16633.25,10202.31 ; 16632.45,10199.68 ccw(c16628.25,10202.4) 16633.25,10202.31 ; 16632.45,10199.68 ccw(c16628.25,10202.4) 16633.25,10202.31 ; 16632.45,10199.68 ccw(c16628.25,10202.4) 16633.25,10202.31 ; 16632.45,10199.68 ccw(c16628.25,10202.4) 16633.25,10202.31 ; 16632.45,10199.68 ccw(c16628.25,10202.4) 16633.25,10202.31 ; 16632.45,10199.68 ccw(c16628.25,10202.4) 16633.25,10202.31 ; 16633,9825.33 16633,10150.02 ; 16633.25,10202.31 16633.25,10341.5 ; 16633.25,10341.5 cw(c16638.25,10341.5) 16634.7,10345.01 ; 16633.25,10341.5 cw(c16638.25,10341.5) 16634.7,10345.01 ; 16633.25,10341.5 cw(c16638.25,10341.5) 16634.7,10345.01 ; 16633.25,10341.5 cw(c16638.25,10341.5) 16634.7,10345.01 ; 16633.25,10341.5 cw(c16638.25,10341.5) 16634.7,10345.01 ; 16633.25,10341.5 cw(c16638.25,10341.5) 16634.7,10345.01 ; 16633.25,10341.5 cw(c16638.25,10341.5) 16634.7,10345.01 ; 16633.25,10341.5 cw(c16638.25,10341.5) 16634.7,10345.01 ; 16633.25,10341.5 cw(c16638.25,10341.5) 16634.7,10345.01 ; 16633.25,10341.5 cw(c16638.25,10341.5) 16634.7,10345.01 ; 16633.25,10341.5 cw(c16638.25,10341.5) 16634.7,10345.01 ; 16633.25,10341.5 cw(c16638.25,10341.5) 16634.7,10345.01 ; 16633.25,10341.5 cw(c16638.25,10341.5) 16634.7,10345.01 ; 16633.25,10341.5 cw(c16638.25,10341.5) 16634.7,10345.01 ; 16633.25,10341.5 cw(c16638.25,10341.5) 16634.7,10345.01 ; 16633.25,10341.5 cw(c16638.25,10341.5) 16634.7,10345.01 ; 16634.7,10345.01 16636.28,10346.59 ; 16636.28,10346.59 ccw(c16618.3,10364.5) 16636.41,10346.72 ; 16636.28,10346.59 ccw(c16618.3,10364.5) 16636.41,10346.72 ; 16636.28,10346.59 ccw(c16618.3,10364.5) 16636.41,10346.72 ; 16636.28,10346.59 ccw(c16618.3,10364.5) 16636.41,10346.72 ; 16636.28,10346.59 ccw(c16618.3,10364.5) 16636.41,10346.72 ; 16636.28,10346.59 ccw(c16618.3,10364.5) 16636.41,10346.72 ; 16636.28,10346.59 ccw(c16618.3,10364.5) 16636.41,10346.72 ; 16636.28,10346.59 ccw(c16618.3,10364.5) 16636.41,10346.72 ; 16636.28,10346.59 ccw(c16618.3,10364.5) 16636.41,10346.72 ; 16636.28,10346.59 ccw(c16618.3,10364.5) 16636.41,10346.72 ; 16636.28,10346.59 ccw(c16618.3,10364.5) 16636.41,10346.72 ; 16636.28,10346.59 ccw(c16618.3,10364.5) 16636.41,10346.72 ; 16636.28,10346.59 ccw(c16618.3,10364.5) 16636.41,10346.72 ; 16636.28,10346.59 ccw(c16618.3,10364.5) 16636.41,10346.72 ; 16636.28,10346.59 ccw(c16618.3,10364.5) 16636.41,10346.72 ; 16636.28,10346.59 ccw(c16618.3,10364.5) 16636.41,10346.72 ; 16636.41,10346.72 16681.61,10392.74 ; 16650.66,10563.18 16669.98,10543.23 ; 16669.98,10543.23 cw(c16644.61,10518.58) 16679.86,10521.48 ; 16669.98,10543.23 cw(c16644.61,10518.58) 16679.86,10521.48 ; 16669.98,10543.23 cw(c16644.61,10518.58) 16679.86,10521.48 ; 16669.98,10543.23 cw(c16644.61,10518.58) 16679.86,10521.48 ; 16669.98,10543.23 cw(c16644.61,10518.58) 16679.86,10521.48 ; 16669.98,10543.23 cw(c16644.61,10518.58) 16679.86,10521.48 ; 16669.98,10543.23 cw(c16644.61,10518.58) 16679.86,10521.48 ; 16669.98,10543.23 cw(c16644.61,10518.58) 16679.86,10521.48 ; 16669.98,10543.23 cw(c16644.61,10518.58) 16679.86,10521.48 ; 16669.98,10543.23 cw(c16644.61,10518.58) 16679.86,10521.48 ; 16669.98,10543.23 cw(c16644.61,10518.58) 16679.86,10521.48 ; 16669.98,10543.23 cw(c16644.61,10518.58) 16679.86,10521.48 ; 16669.98,10543.23 cw(c16644.61,10518.58) 16679.86,10521.48 ; 16669.98,10543.23 cw(c16644.61,10518.58) 16679.86,10521.48 ; 16669.98,10543.23 cw(c16644.61,10518.58) 16679.86,10521.48 ; 16669.98,10543.23 cw(c16644.61,10518.58) 16679.86,10521.48 ; 16681.61,10392.74 ccw(c16663.51,10410.52) 16688.8,10412.59 ; 16681.61,10392.74 ccw(c16663.51,10410.52) 16688.8,10412.59 ; 16681.61,10392.74 ccw(c16663.51,10410.52) 16688.8,10412.59 ; 16681.61,10392.74 ccw(c16663.51,10410.52) 16688.8,10412.59 ; 16681.61,10392.74 ccw(c16663.51,10410.52) 16688.8,10412.59 ; 16681.61,10392.74 ccw(c16663.51,10410.52) 16688.8,10412.59 ; 16681.61,10392.74 ccw(c16663.51,10410.52) 16688.8,10412.59 ; 16681.61,10392.74 ccw(c16663.51,10410.52) 16688.8,10412.59 ; 16681.61,10392.74 ccw(c16663.51,10410.52) 16688.8,10412.59 ; 16681.61,10392.74 ccw(c16663.51,10410.52) 16688.8,10412.59 ; 16681.61,10392.74 ccw(c16663.51,10410.52) 16688.8,10412.59 ; 16681.61,10392.74 ccw(c16663.51,10410.52) 16688.8,10412.59 ; 16681.61,10392.74 ccw(c16663.51,10410.52) 16688.8,10412.59 ; 16681.61,10392.74 ccw(c16663.51,10410.52) 16688.8,10412.59 ; 16681.61,10392.74 ccw(c16663.51,10410.52) 16688.8,10412.59 ; 16681.61,10392.74 ccw(c16663.51,10410.52) 16688.8,10412.59
  Bottom 6+gnd w5: v1@16617.13,9713.75 U2.8@16617.13,9775.59 ; R60.2@17947.32,10890.29 17948.15,10890.11 17960.69,10887.45 v1(17982.46,10887.45)
D5: IC1.59 R61.2 U1.10 U2.10 | length 4236.6
  Top Layer 1 w5: IC1.59@16526.73,10466.06 16527.3,10466.63 16527.3,10518.01 v1(16527.87,10518.58) ; v1(16553.89,10174.13) 16553.89,10193.72 U1.10@16554.13,10236.22
  Unused w5: v1(16553.89,10174.13) 16555.43,10172.64 ccw(c16558.89,10176.25) 16556.29,10171.98 16577.74,10158.97 ccw(c16585.65,10172.15) 16582.55,10157.09 16763.14,10119.91 ccw(c16774.36,10174.13) 16774.36,10118.76 16805.86,10118.76 ccw(c16805.86,10174.13) 16824.13,10121.86 16859.61,10134.21 cw(c16871.26,10100.81) 16860.13,10134.39 17593.62,10377.46 ccw(c17573.21,10439.17) 17597.15,10378.74 17655.15,10401.64 cw(c17710.04,10262.58) 17668.53,10406.2 17877.13,10466.55 ccw(c17859.4,10529.09) 17892.16,10472.95 18016.52,10545.52 ccw(c17983.57,10601.98) 18048.94,10601.98 18048.94,10681.98 ccw(c17983.57,10681.98) 18047.31,10696.49 18037.57,10739.21 ccw(c17983.57,10726.98) 18037.1,10741.16 17997.32,10891.39 ccw(c17982.46,10887.45) 17996.91,10892.71 v1(17982.46,10932.45)
  Layer 3 w5: v1(16527.87,10518.58) 16532.96,10551.19 cw(c16548.15,10548.82) 16548.2,10564.19 16625.31,10563.96 ; v1(16553.89,9713.5) 16553.89,9805.11 cw(c16558.89,9805.12) 16555.33,9808.63 16568.55,9821.89 ; v1@16553.89,10172.06 ccw(c16558.89,10172.07) v1@16555.13,10168.77 ; v1@16553.89,10172.06 ccw(c16558.89,10172.07) v1@16555.13,10168.77 ; v1@16553.89,10172.06 ccw(c16558.89,10172.07) v1@16555.13,10168.77 ; v1@16553.89,10172.06 ccw(c16558.89,10172.07) v1@16555.13,10168.77 ; v1@16553.89,10172.06 ccw(c16558.89,10172.07) v1@16555.13,10168.77 ; v1@16553.89,10172.06 ccw(c16558.89,10172.07) v1@16555.13,10168.77 ; v1@16553.89,10172.06 ccw(c16558.89,10172.07) v1@16555.13,10168.77 ; v1@16553.89,10172.06 ccw(c16558.89,10172.07) v1@16555.13,10168.77 ; v1@16553.89,10172.06 ccw(c16558.89,10172.07) v1@16555.13,10168.77 ; v1@16553.89,10172.06 ccw(c16558.89,10172.07) v1@16555.13,10168.77 ; v1@16553.89,10172.06 ccw(c16558.89,10172.07) v1@16555.13,10168.77 ; v1@16553.89,10172.06 ccw(c16558.89,10172.07) v1@16555.13,10168.77 ; v1@16553.89,10172.06 ccw(c16558.89,10172.07) v1@16555.13,10168.77 ; v1@16553.89,10172.06 ccw(c16558.89,10172.07) v1@16555.13,10168.77 ; v1@16553.89,10172.06 ccw(c16558.89,10172.07) v1@16555.13,10168.77 ; v1@16553.89,10172.06 ccw(c16558.89,10172.07) v1@16555.13,10168.77 ; v1@16553.89,10172.06 v1(16553.89,10174.13) 16568.14,10188.43 ccw(c16564.6,10191.96) 16569.6,10191.87 16569.6,10344.72 cw(c16574.6,10344.72) 16571.6,10348.72 16609.09,10376.81 ; v1@16555.13,10168.77 16568.77,10153.23 ; 16568.55,9821.89 ccw(c16565.01,9825.42) 16570.01,9825.33 ; 16568.55,9821.89 ccw(c16565.01,9825.42) 16570.01,9825.33 ; 16568.55,9821.89 ccw(c16565.01,9825.42) 16570.01,9825.33 ; 16568.55,9821.89 ccw(c16565.01,9825.42) 16570.01,9825.33 ; 16568.55,9821.89 ccw(c16565.01,9825.42) 16570.01,9825.33 ; 16568.55,9821.89 ccw(c16565.01,9825.42) 16570.01,9825.33 ; 16568.55,9821.89 ccw(c16565.01,9825.42) 16570.01,9825.33 ; 16568.55,9821.89 ccw(c16565.01,9825.42) 16570.01,9825.33 ; 16568.55,9821.89 ccw(c16565.01,9825.42) 16570.01,9825.33 ; 16568.55,9821.89 ccw(c16565.01,9825.42) 16570.01,9825.33 ; 16568.55,9821.89 ccw(c16565.01,9825.42) 16570.01,9825.33 ; 16568.55,9821.89 ccw(c16565.01,9825.42) 16570.01,9825.33 ; 16568.55,9821.89 ccw(c16565.01,9825.42) 16570.01,9825.33 ; 16568.55,9821.89 ccw(c16565.01,9825.42) 16570.01,9825.33 ; 16568.55,9821.89 ccw(c16565.01,9825.42) 16570.01,9825.33 ; 16568.55,9821.89 ccw(c16565.01,9825.42) 16570.01,9825.33 ; 16568.77,10153.23 cw(c16565.01,10149.93) 16570.01,10150.02 ; 16568.77,10153.23 cw(c16565.01,10149.93) 16570.01,10150.02 ; 16568.77,10153.23 cw(c16565.01,10149.93) 16570.01,10150.02 ; 16568.77,10153.23 cw(c16565.01,10149.93) 16570.01,10150.02 ; 16568.77,10153.23 cw(c16565.01,10149.93) 16570.01,10150.02 ; 16568.77,10153.23 cw(c16565.01,10149.93) 16570.01,10150.02 ; 16568.77,10153.23 cw(c16565.01,10149.93) 16570.01,10150.02 ; 16568.77,10153.23 cw(c16565.01,10149.93) 16570.01,10150.02 ; 16568.77,10153.23 cw(c16565.01,10149.93) 16570.01,10150.02 ; 16568.77,10153.23 cw(c16565.01,10149.93) 16570.01,10150.02 ; 16568.77,10153.23 cw(c16565.01,10149.93) 16570.01,10150.02 ; 16568.77,10153.23 cw(c16565.01,10149.93) 16570.01,10150.02 ; 16568.77,10153.23 cw(c16565.01,10149.93) 16570.01,10150.02 ; 16568.77,10153.23 cw(c16565.01,10149.93) 16570.01,10150.02 ; 16568.77,10153.23 cw(c16565.01,10149.93) 16570.01,10150.02 ; 16568.77,10153.23 cw(c16565.01,10149.93) 16570.01,10150.02 ; 16570.01,9825.33 16570.01,10150.02 ; 16609.09,10376.81 cw(c16618.3,10364.5) 16610.63,10377.83 ; 16609.09,10376.81 cw(c16618.3,10364.5) 16610.63,10377.83 ; 16609.09,10376.81 cw(c16618.3,10364.5) 16610.63,10377.83 ; 16609.09,10376.81 cw(c16618.3,10364.5) 16610.63,10377.83 ; 16609.09,10376.81 cw(c16618.3,10364.5) 16610.63,10377.83 ; 16609.09,10376.81 cw(c16618.3,10364.5) 16610.63,10377.83 ; 16609.09,10376.81 cw(c16618.3,10364.5) 16610.63,10377.83 ; 16609.09,10376.81 cw(c16618.3,10364.5) 16610.63,10377.83 ; 16609.09,10376.81 cw(c16618.3,10364.5) 16610.63,10377.83 ; 16609.09,10376.81 cw(c16618.3,10364.5) 16610.63,10377.83 ; 16609.09,10376.81 cw(c16618.3,10364.5) 16610.63,10377.83 ; 16609.09,10376.81 cw(c16618.3,10364.5) 16610.63,10377.83 ; 16609.09,10376.81 cw(c16618.3,10364.5) 16610.63,10377.83 ; 16609.09,10376.81 cw(c16618.3,10364.5) 16610.63,10377.83 ; 16609.09,10376.81 cw(c16618.3,10364.5) 16610.63,10377.83 ; 16609.09,10376.81 cw(c16618.3,10364.5) 16610.63,10377.83 ; 16610.63,10377.83 16635.48,10392.14 ; 16625.31,10563.96 cw(c16625.24,10538.58) 16643.47,10556.23 ; 16625.31,10563.96 cw(c16625.24,10538.58) 16643.47,10556.23 ; 16625.31,10563.96 cw(c16625.24,10538.58) 16643.47,10556.23 ; 16625.31,10563.96 cw(c16625.24,10538.58) 16643.47,10556.23 ; 16625.31,10563.96 cw(c16625.24,10538.58) 16643.47,10556.23 ; 16625.31,10563.96 cw(c16625.24,10538.58) 16643.47,10556.23 ; 16625.31,10563.96 cw(c16625.24,10538.58) 16643.47,10556.23 ; 16625.31,10563.96 cw(c16625.24,10538.58) 16643.47,10556.23 ; 16625.31,10563.96 cw(c16625.24,10538.58) 16643.47,10556.23 ; 16625.31,10563.96 cw(c16625.24,10538.58) 16643.47,10556.23 ; 16625.31,10563.96 cw(c16625.24,10538.58) 16643.47,10556.23 ; 16625.31,10563.96 cw(c16625.24,10538.58) 16643.47,10556.23 ; 16625.31,10563.96 cw(c16625.24,10538.58) 16643.47,10556.23 ; 16625.31,10563.96 cw(c16625.24,10538.58) 16643.47,10556.23 ; 16625.31,10563.96 cw(c16625.24,10538.58) 16643.47,10556.23 ; 16625.31,10563.96 cw(c16625.24,10538.58) 16643.47,10556.23 ; 16635.48,10392.14 cw(c16643.15,10378.82) 16642.45,10394.18 ; 16635.48,10392.14 cw(c16643.15,10378.82) 16642.45,10394.18 ; 16635.48,10392.14 cw(c16643.15,10378.82) 16642.45,10394.18 ; 16635.48,10392.14 cw(c16643.15,10378.82) 16642.45,10394.18 ; 16635.48,10392.14 cw(c16643.15,10378.82) 16642.45,10394.18 ; 16635.48,10392.14 cw(c16643.15,10378.82) 16642.45,10394.18 ; 16635.48,10392.14 cw(c16643.15,10378.82) 16642.45,10394.18 ; 16635.48,10392.14 cw(c16643.15,10378.82) 16642.45,10394.18 ; 16635.48,10392.14 cw(c16643.15,10378.82) 16642.45,10394.18 ; 16635.48,10392.14 cw(c16643.15,10378.82) 16642.45,10394.18 ; 16635.48,10392.14 cw(c16643.15,10378.82) 16642.45,10394.18 ; 16635.48,10392.14 cw(c16643.15,10378.82) 16642.45,10394.18 ; 16635.48,10392.14 cw(c16643.15,10378.82) 16642.45,10394.18 ; 16635.48,10392.14 cw(c16643.15,10378.82) 16642.45,10394.18 ; 16635.48,10392.14 cw(c16643.15,10378.82) 16642.45,10394.18 ; 16635.48,10392.14 cw(c16643.15,10378.82) 16642.45,10394.18 ; 16642.45,10394.18 16664.2,10395.16 ; 16643.47,10556.23 16662.83,10536.23 cw(c16644.61,10518.58) 16669.9,10520.66 16678.83,10411.78 ; 16664.2,10395.16 ccw(c16663.51,10410.52) 16678.83,10411.78 ; 16664.2,10395.16 ccw(c16663.51,10410.52) 16678.83,10411.78 ; 16664.2,10395.16 ccw(c16663.51,10410.52) 16678.83,10411.78 ; 16664.2,10395.16 ccw(c16663.51,10410.52) 16678.83,10411.78 ; 16664.2,10395.16 ccw(c16663.51,10410.52) 16678.83,10411.78 ; 16664.2,10395.16 ccw(c16663.51,10410.52) 16678.83,10411.78 ; 16664.2,10395.16 ccw(c16663.51,10410.52) 16678.83,10411.78 ; 16664.2,10395.16 ccw(c16663.51,10410.52) 16678.83,10411.78 ; 16664.2,10395.16 ccw(c16663.51,10410.52) 16678.83,10411.78 ; 16664.2,10395.16 ccw(c16663.51,10410.52) 16678.83,10411.78 ; 16664.2,10395.16 ccw(c16663.51,10410.52) 16678.83,10411.78 ; 16664.2,10395.16 ccw(c16663.51,10410.52) 16678.83,10411.78 ; 16664.2,10395.16 ccw(c16663.51,10410.52) 16678.83,10411.78 ; 16664.2,10395.16 ccw(c16663.51,10410.52) 16678.83,10411.78 ; 16664.2,10395.16 ccw(c16663.51,10410.52) 16678.83,10411.78 ; 16664.2,10395.16 ccw(c16663.51,10410.52) 16678.83,10411.78
  Bottom 6+gnd w5: v1@16554.13,9713.75 U2.10@16554.13,9775.59 ; R61.2@17947.32,10931.6 17981.61,10931.6 v1(17982.46,10932.45)